# Altium PCB PCB1.PcbDoc (part 1 of 3)
Units mil, origin at the board's own origin, x right, y up, seen from the top; angles counter-clockwise.
Board outline 3937.79 x 3937.79 mil, 4 copper layers (L1, L2, L3, L4), stack 61.811 mil thick; 103 components, 203 nets, 917 pads, 494 vias.
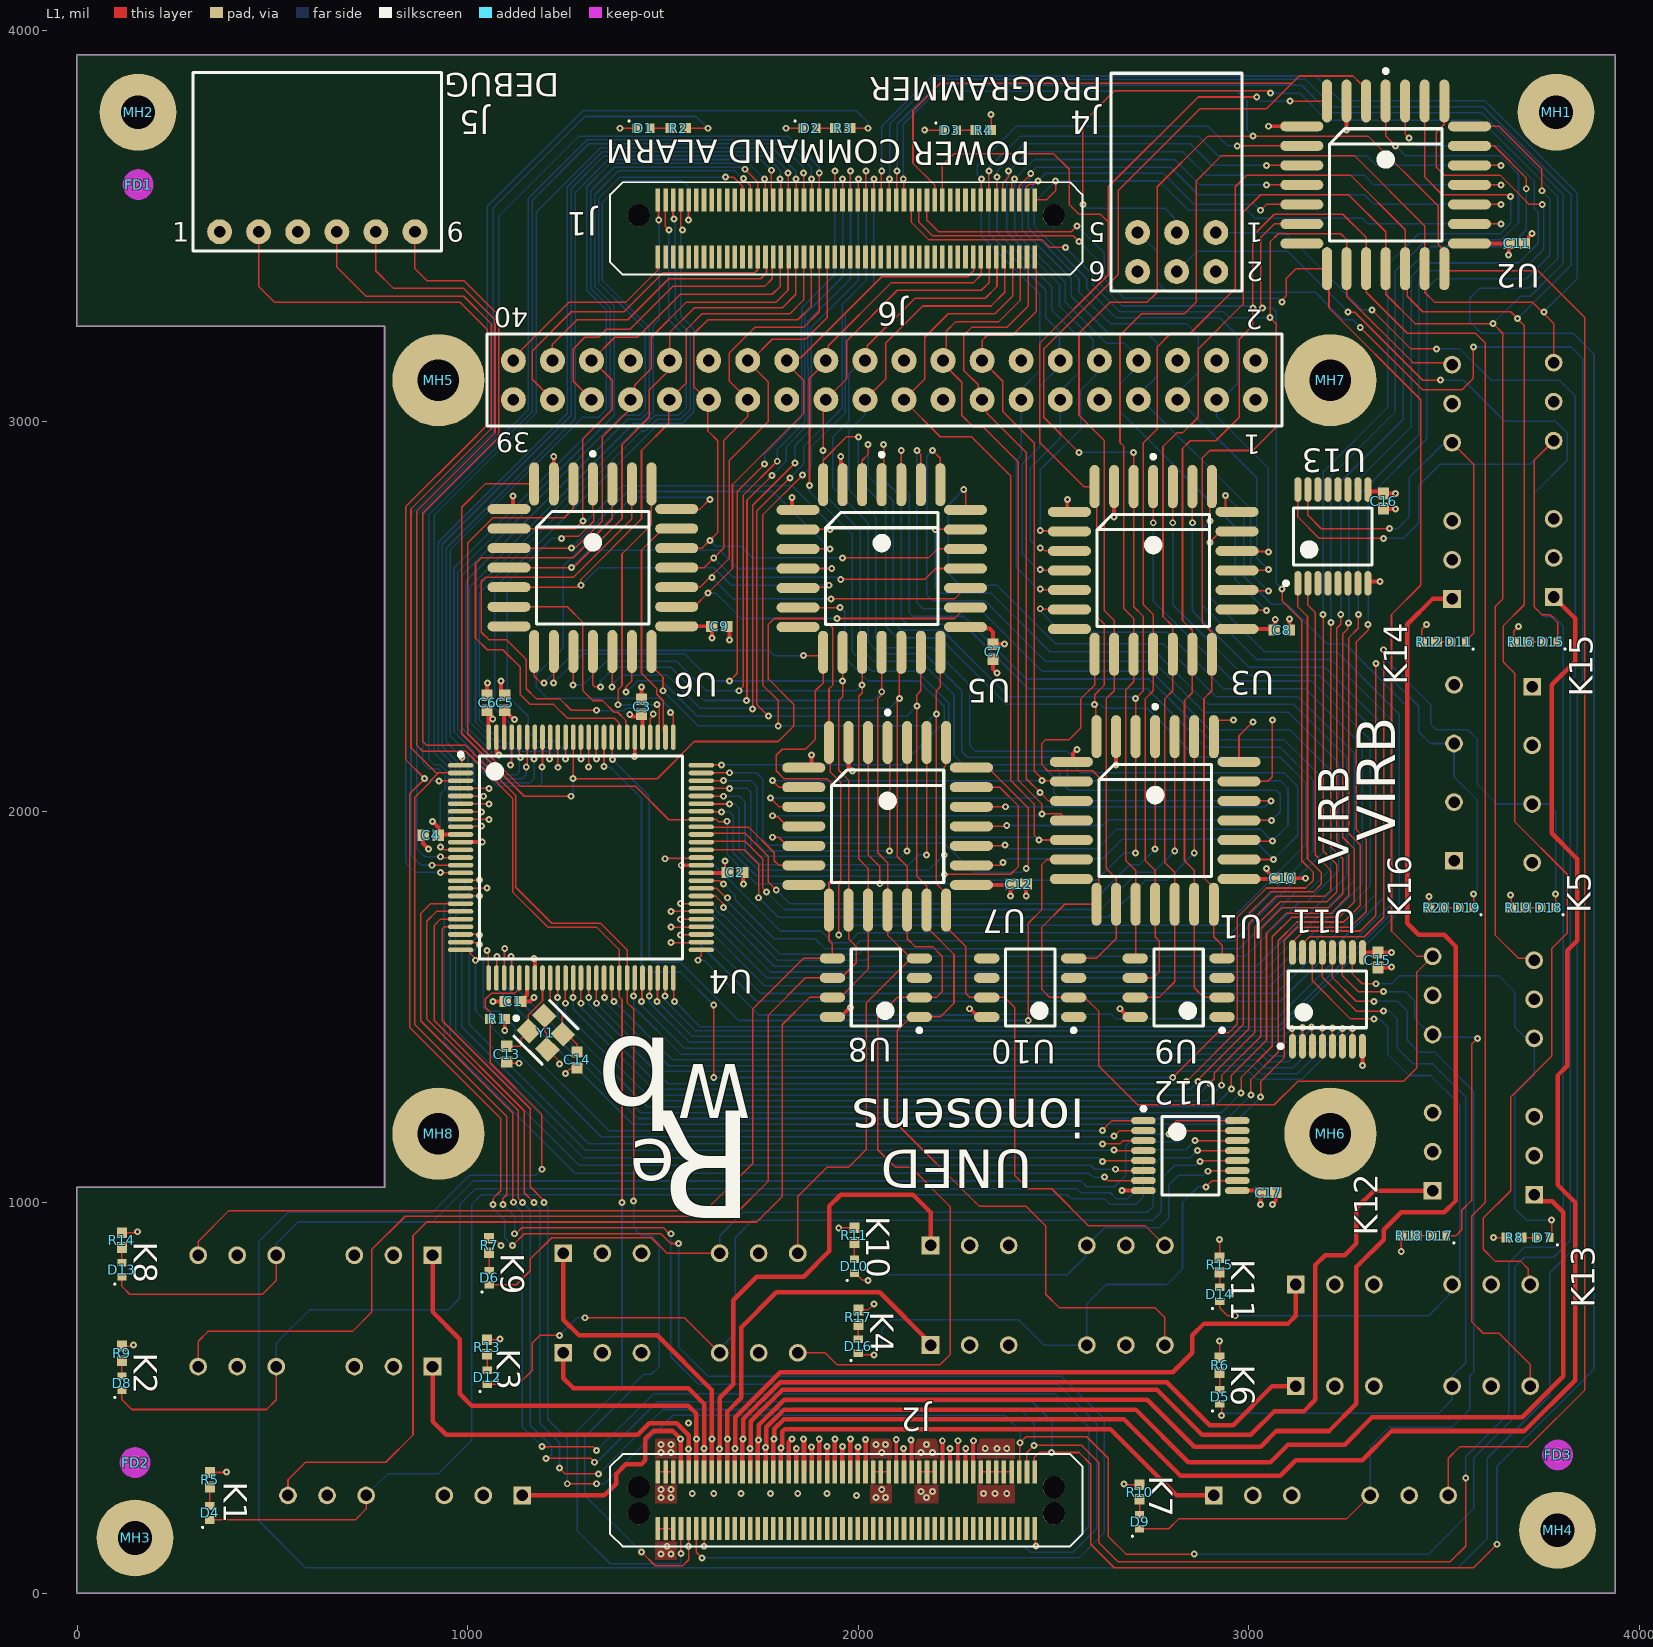
[diagram p0: L1 view]
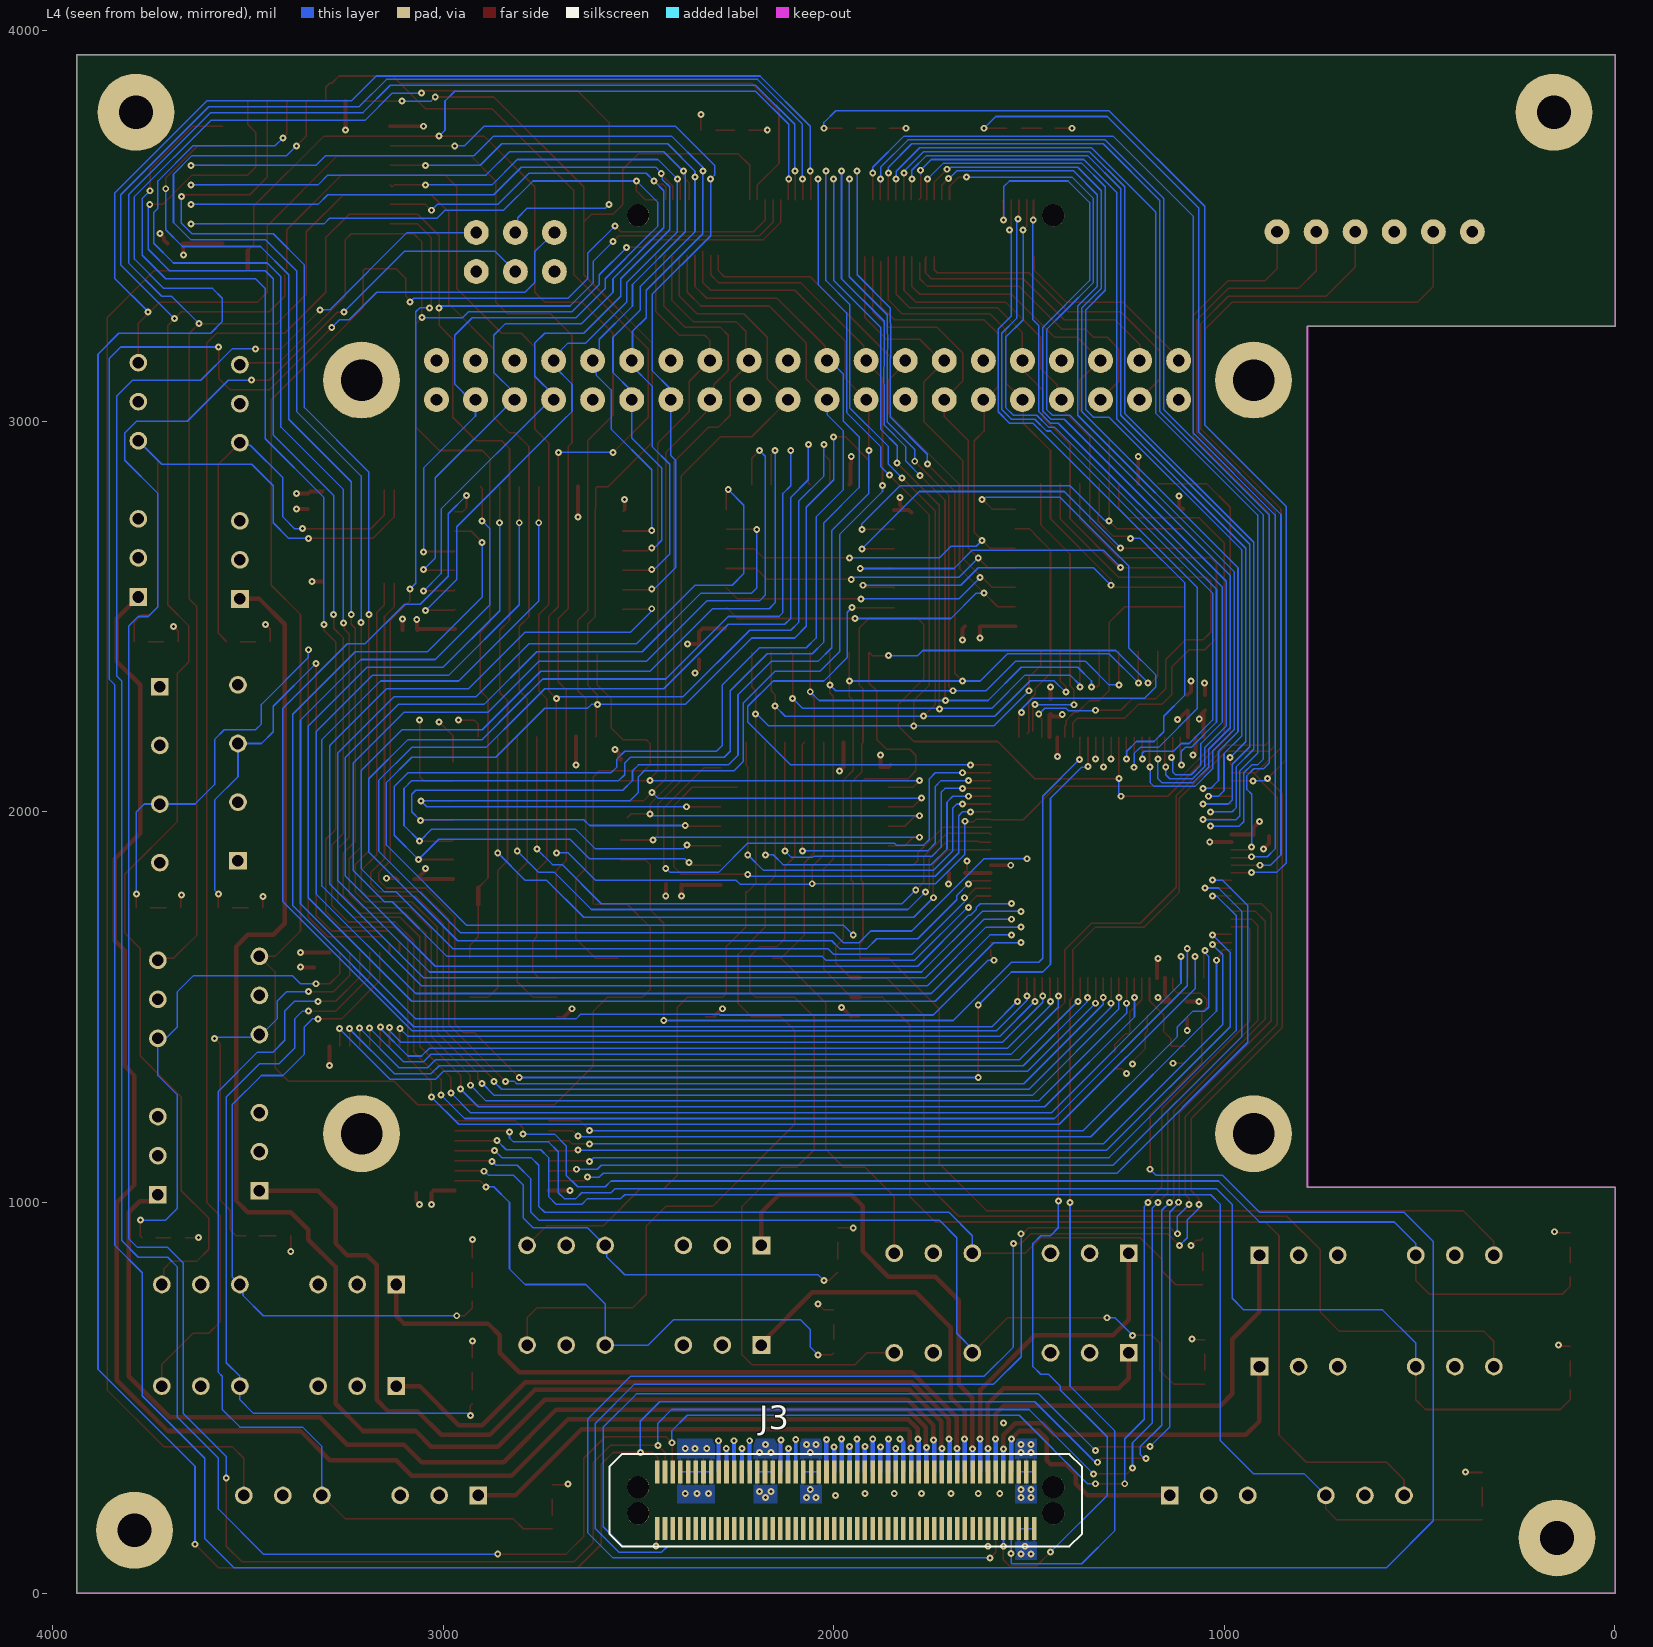
[diagram p1: L4 view, seen from below]
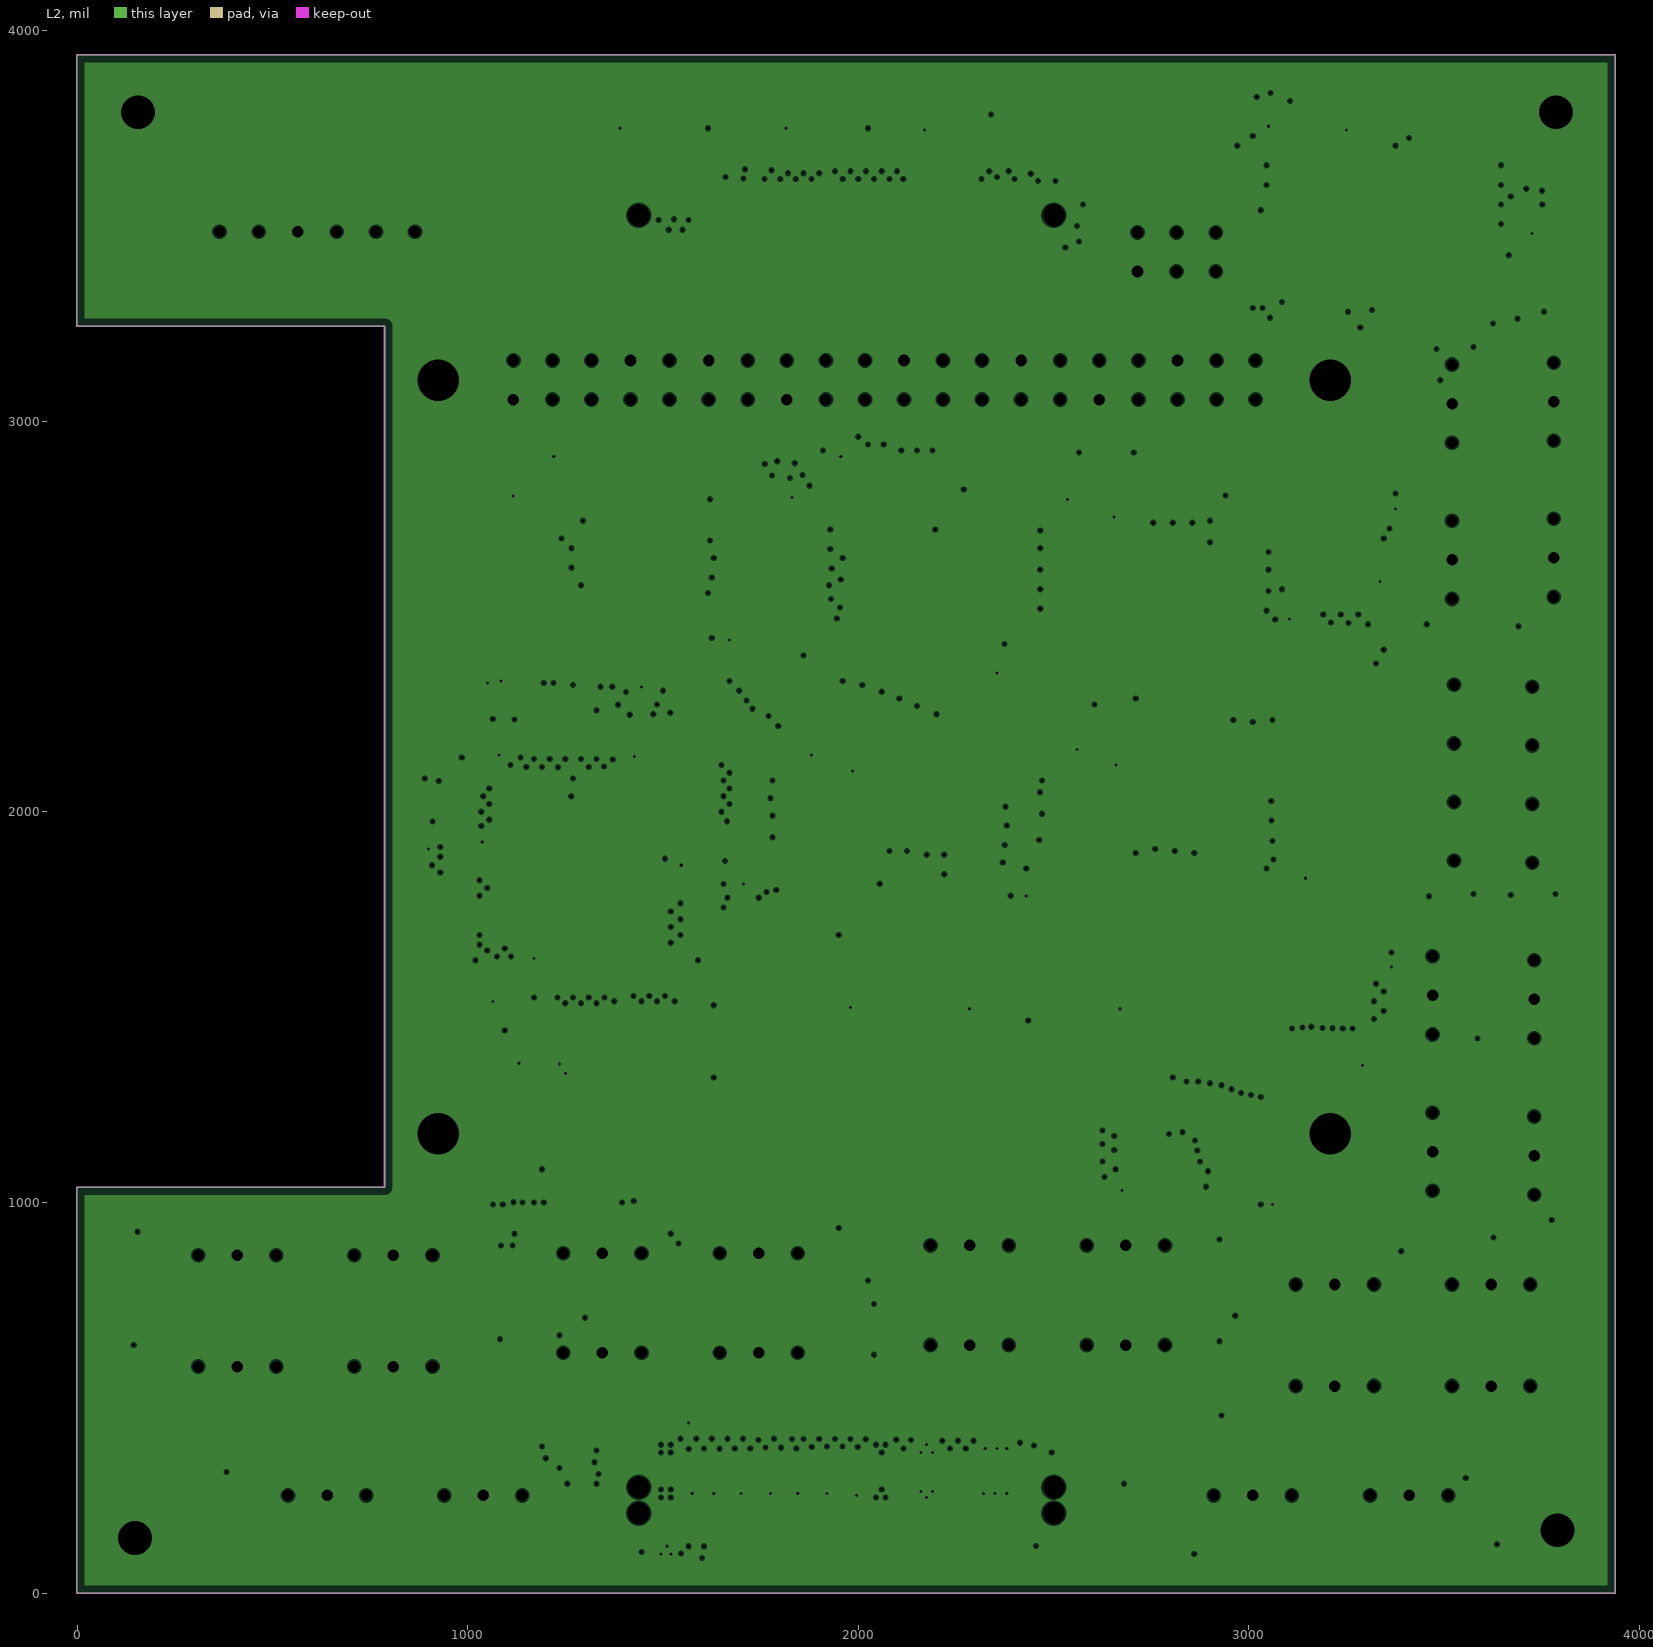
[diagram p2: L2, clearances drawn from the general rule]
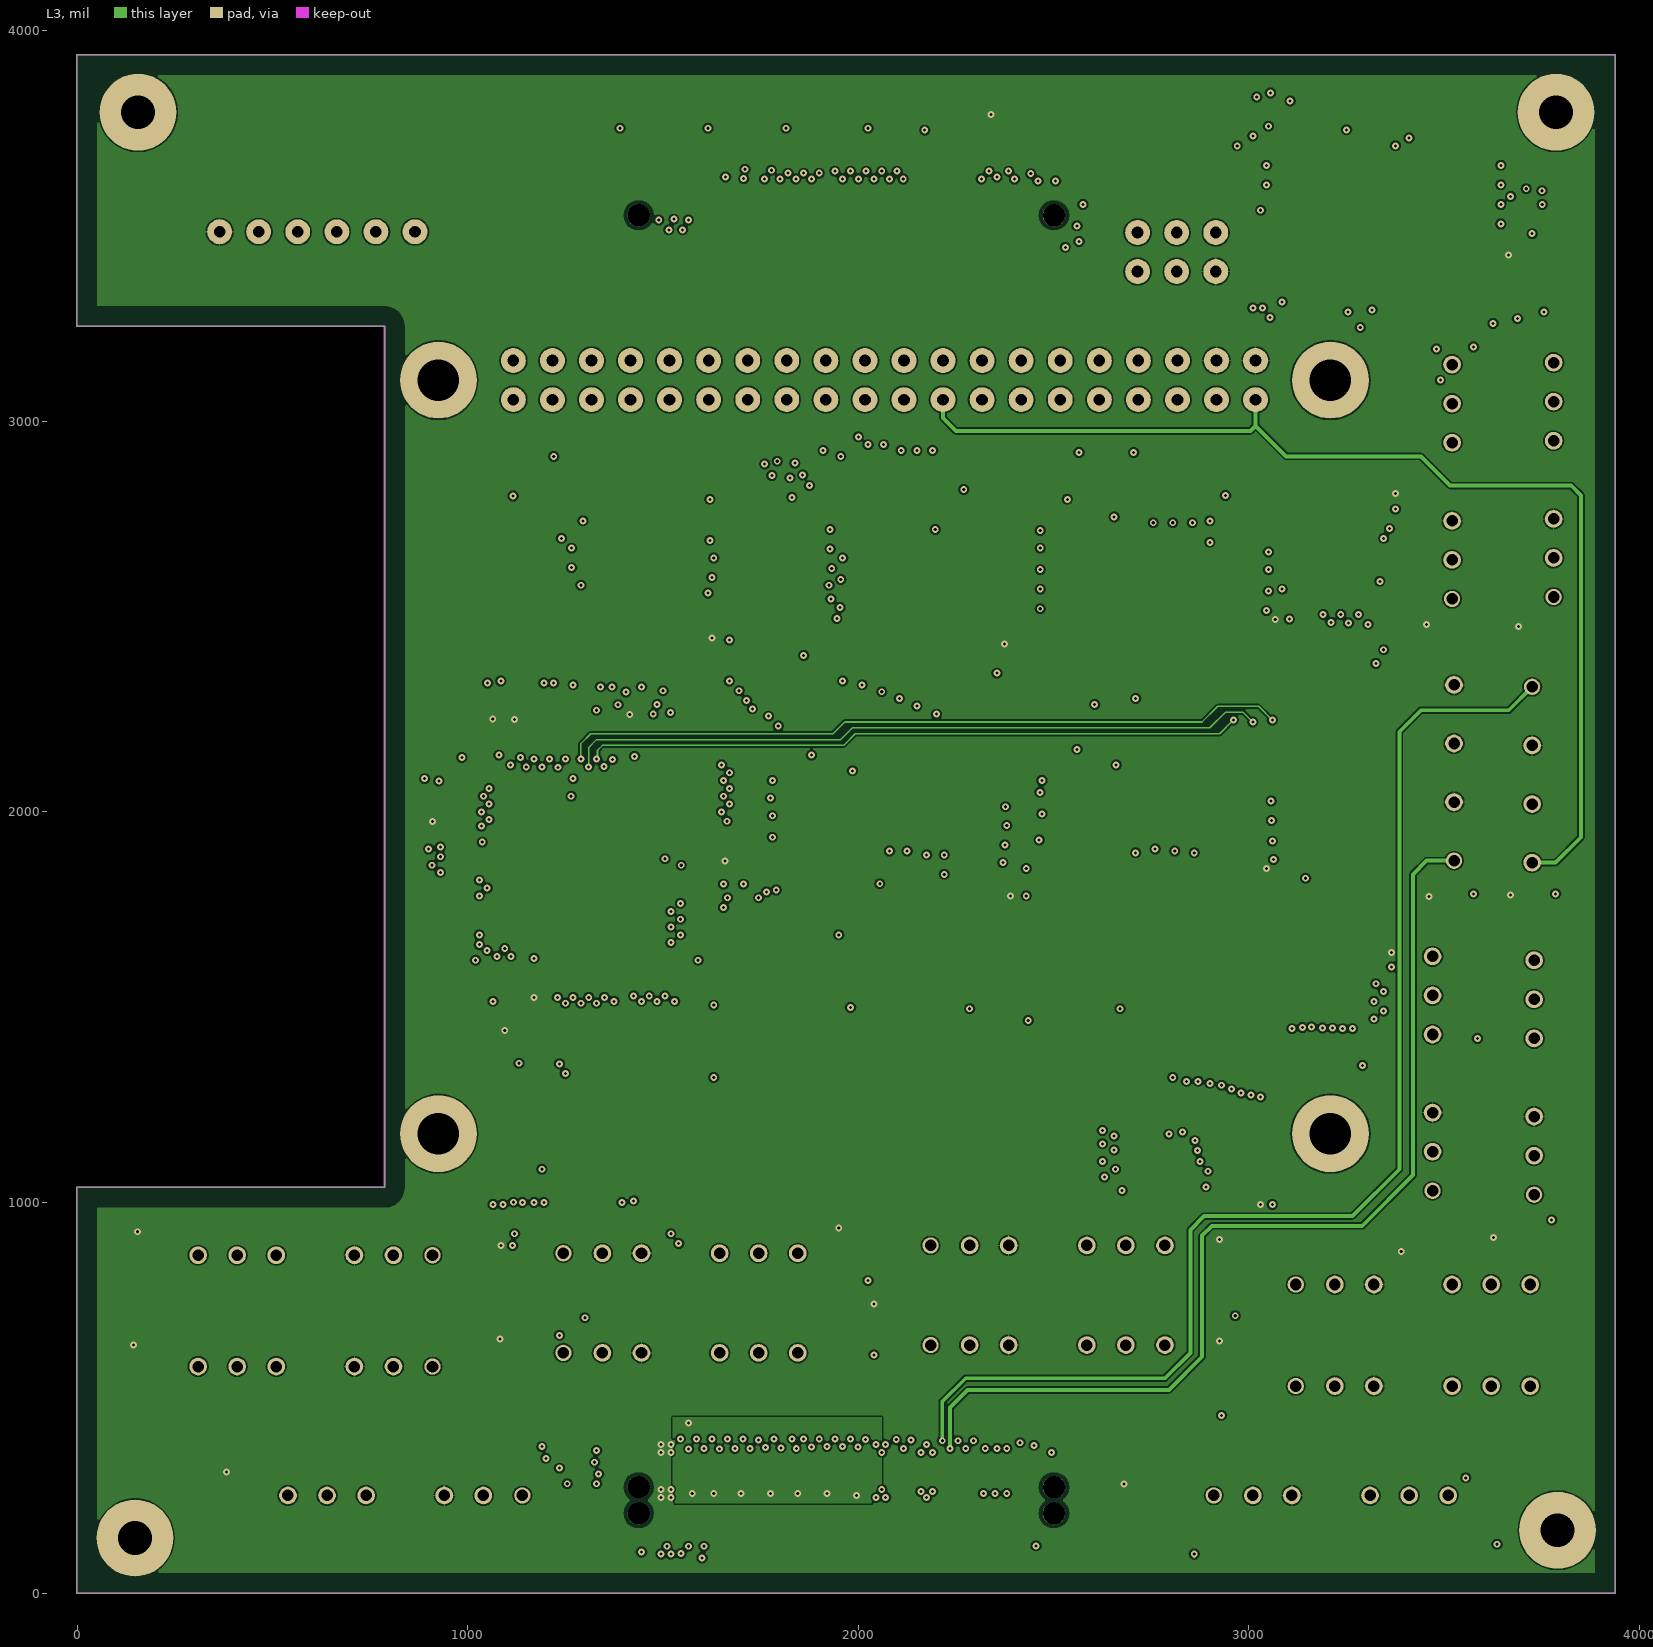
[diagram p3: L3]
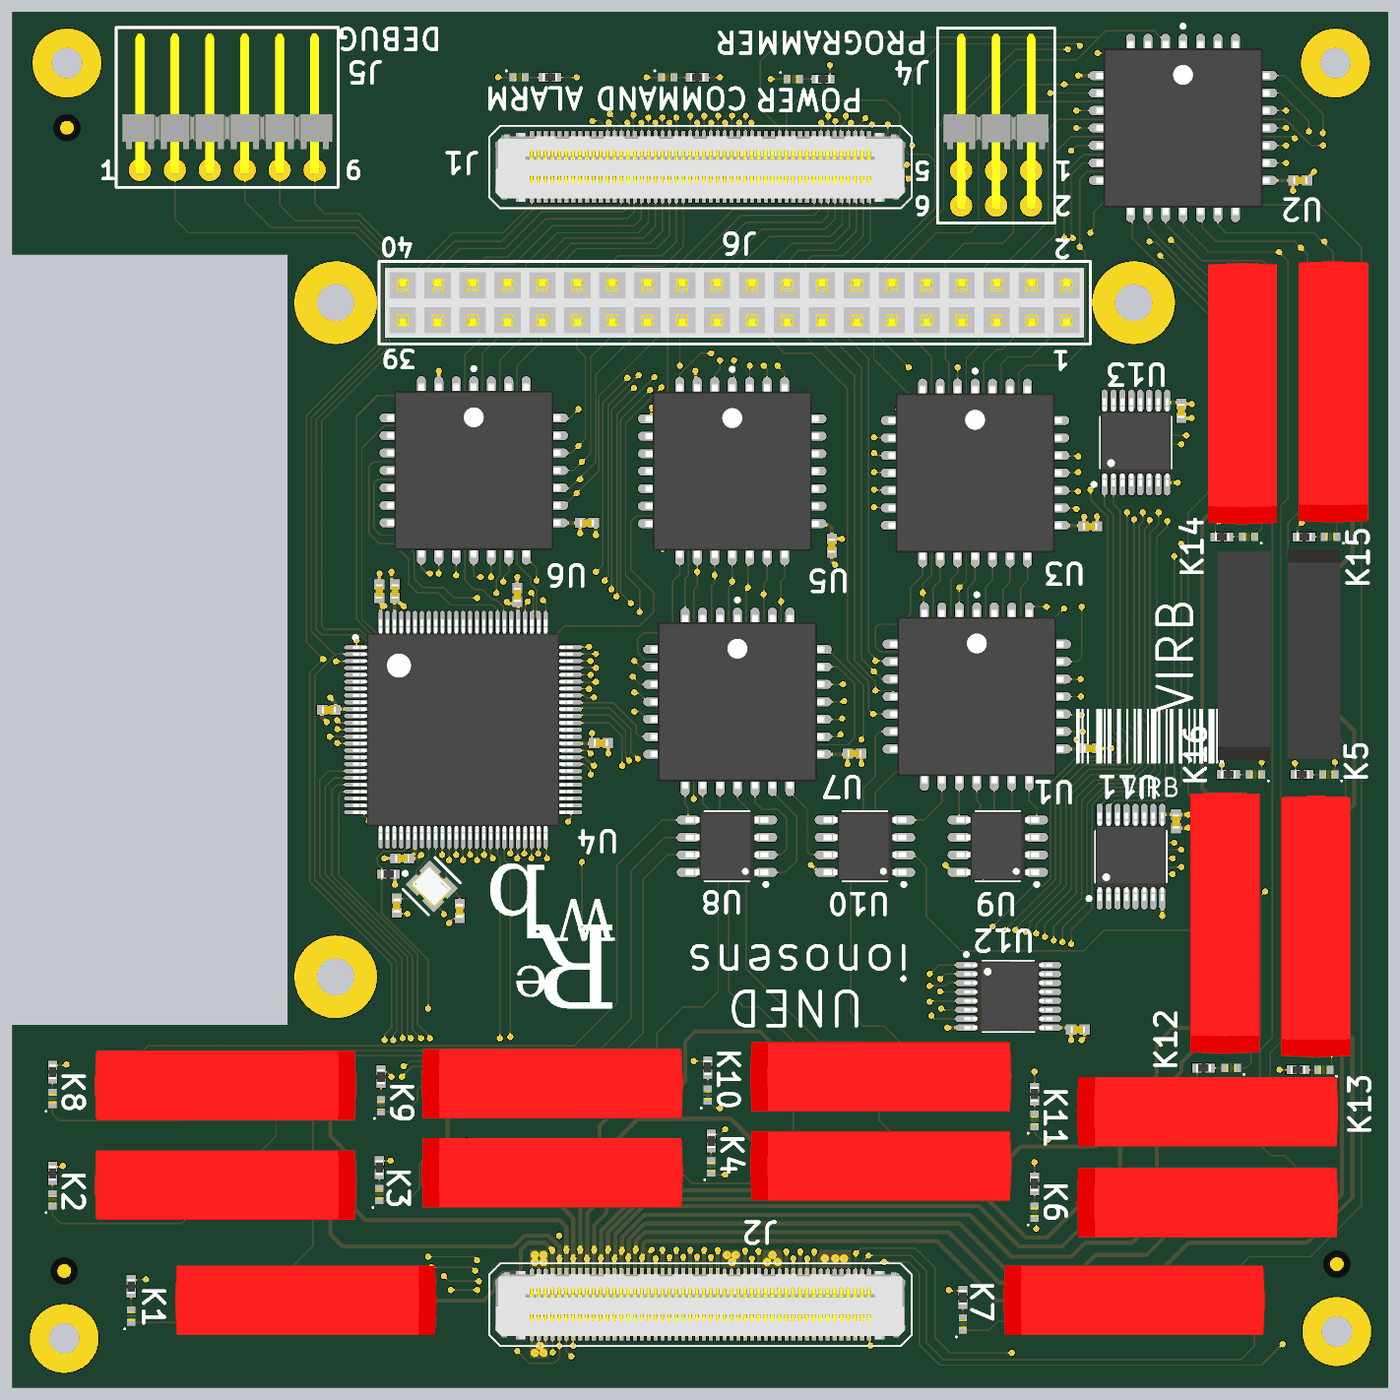
[diagram p6: 3D render of the assembled board from above, using the file's embedded part models]

## Layer stack, top to bottom
Top Mask: solder mask 0.5906, Solder Resist, Dk 3.8
L1: signal copper 1.378
Dielectric 1: prepreg 7.874, 7628, Dk 4.6
L2: plane copper 0.689, net GND
Core: core 41.9291, FR-4, Dk 4.5
L3: signal copper 0.689
Dielectric 2: prepreg 7.874, 7628, Dk 4.6
L4: signal copper 1.378
Bottom Mask: solder mask 0.5906, Solder Resist, Dk 3.8

## Board outline
-0.39,0.38 cw(c0,0.38) -0.27,0.66 -0.27,1038.27 cw(c0,1038.27) 0,1038.54 787.14,1038.54 787.14,3242.73 0,3242.73 cw(c0,3243) -0.27,3243 -0.27,3937.1 cw(c0,3937.38) -0.39,3937.38 cw(c0,3937.38) 0,3937.77 cw(c0,3937.38) 0.29,3937.65 3936.72,3937.65 cw(c3937.01,3937.38) 3937.01,3937.77 cw(c3937.01,3937.38) 3937.4,3937.38 cw(c3937.01,3937.38) 3937.27,3937.1 3937.27,0.66 cw(c3937.01,0.38) 3937.4,0.38 cw(c3937.01,0.38) 3937.01,-0.01 cw(c3937.01,0.38) 3936.72,0.11 0.29,0.11 cw(c0,0.38) 0,-0.01 cw(c0,0.38)

## Design rules (kind name [scope] priority, off if disabled: settings)
BoardOutlineClearance [All] p1: gap=7.87 ignorepadtopadclearanceinfootprint=FALSE
Clearance Clearance_keepoutlayer [All vs OnLayer('Keep-Out Layer')] p1: gap=50 ignorepadtopadclearanceinfootprint=FALSE except(4: Arc-THPad Track-THPad SMDPad-THPad THPad-THPad THPad-Via THPad-Fill THPad-Poly THPad-Region THPad-Text; 9.84: Arc-Hole Track-Hole SMDPad-Hole THPad-Hole Via-Hole Fill-Hole Poly-Hole Region-Hole Text-Hole)
Clearance [All] p2: gap=4 ignorepadtopadclearanceinfootprint=FALSE except(5: Arc-Via Track-Via SMDPad-Via THPad-Via Via-Via Via-Fill Via-Poly Via-Region Via-Text; 9.84: Arc-Hole Track-Hole SMDPad-Hole THPad-Hole Via-Hole Fill-Hole Poly-Hole Region-Hole Text-Hole)
ComponentClearance [All] p1: gap=4 collisioncheckmode=3 verticalgap=4 showdistances=TRUE
DiffPairsRouting [All] p1: maxlimit=4 minlimit=4 mostfreqgap=4 toplayer_minwidth=4 toplayer_maxwidth=71497.94 toplayer_prefwidth=4 midlayer14_minwidth=4 midlayer14_maxwidth=71497.94 midlayer14_prefwidth=4 bottomlayer_minwidth=4 bottomlayer_maxwidth=71497.94 bottomlayer_prefwidth=4 maxuncoupledlength=500
Height [All] p1: minheight=0 maxheight=71497.94 prefheight=500
HoleSize [All] p1: absolutevalues=TRUE maxlimit=248.03 minlimit=7.87 maxpercent=80.000 minpercent=20.000
HoleToHoleClearance [All] p1: gap=9.84 allowstackedmicrovias=FALSE
MinimumAnnularRing [All] p1: minimumring=3
MinimumSolderMaskSliver [All] p1: minsoldermaskwidth=0
PlaneClearance [All] p1: clearance=4
PlaneConnect PlaneConnectPowerPads [InPadClass('PowerPads')] p1: planeconnectstyle=Direct reliefexpansion=20 reliefentries=4 reliefconductorwidth=10 reliefairgap=10
PlaneConnect [All] p2: pad.planeconnectstyle=Relief pad.reliefexpansion=11.81 pad.reliefentries=4 pad.reliefconductorwidth=4 pad.reliefairgap=4 via.planeconnectstyle=Direct via.reliefexpansion=11.81 via.reliefentries=4 via.reliefconductorwidth=5 via.reliefairgap=5
PolygonConnect PolygonConnectPowerPads [All vs (InPadClass('PowerPads'))] p1: connectstyle=Direct reliefconductorwidth=10 reliefentries=4 polygonreliefangle="90 Angle" airgapwidth=10
PolygonConnect [All] p2: thpad.connectstyle=Relief thpad.reliefconductorwidth=4 thpad.reliefentries=4 thpad.polygonreliefangle="90 Angle" thpad.airgapwidth=4 smdpad.connectstyle=Relief smdpad.reliefconductorwidth=4 smdpad.reliefentries=4 smdpad.polygonreliefangle="90 Angle" smdpad.airgapwidth=4 via.connectstyle=Direct via.reliefconductorwidth=5 via.reliefentries=4 via.polygonreliefangle="90 Angle" via.airgapwidth=5
RoutingVias [All] p1: holewidth=7.87 width=17.72 viastyle="Through Hole" minholewidth=7.87 minwidth=17.72 maxholewidth=248.03 maxwidth=257.87
SilkToSilkClearance [All] p1: silktosilkclearance=0
SilkToSolderMaskClearance [IsPad] p1: minsilkscreentomaskgap=4 clearancetoexposedcopper=TRUE
SolderMaskExpansion [All] p1: expansion=2.95 istentingtop=FALSE
Width Width_50ohm [InNetClass('Nodes')] p1: maxlimit=11.55 minlimit=10 preferedwidth=11.55 toplayer_minwidth=11.55 bottomlayer_minwidth=11.55 impedanceprofiledriven=TRUE impedanceprofileid={71EFCF26-AA08-4542-81EE-32E5ED174DB4} impedanceprofilevalue=50.000000 minimp=50.000000 maximp=50.000000 favimp=50.000000
Width [All] p2: maxlimit=71497.94 minlimit=4 preferedwidth=4
20 further rules are at their usual default settings.

## Classes and differential pairs
net class Nodes: A B C D E F G H I J K L M N O P Q R S T U W X Y Z
component class Sheet3: FD1 FD2 FD3 J1 J2 J3 J4 J5 J6 MH1 MH2 MH3 MH4 MH5 MH6 MH7 MH8
component class Sheet2: D4 D5 D6 D7 D8 D9 D10 D11 D12 D13 D14 D15 D16 D17 D18 D19 K1 K2 K3 K4 K5 K6 K7 K8 K9 K10 K11 K12 K13 K14 K15 K16 R5 R6 R7 R8 R9 R10 R11 R12 R13 R14 R15 R16 R17 R18 R19 R20
component class Sheet1: C1 C2 C3 C4 C5 C6 C7 C8 C9 C10 C11 C12 C13 C14 C15 C16 C17 D1 D2 D3 R1 R2 R3 R4 U1 U2 U3 U4 U5 U6 U7 U8 U9 U10 U11 U12 U13 Y1

## Components (designator, comment, footprint, x,y, rotation, side; value= is the part's Value field where it differs from the comment)
C1 "CC0402JRX7R7BB104" CAPC1005X06M#1 1115.71,1515 r0 top value=100nF
C2 "CC0402JRX7R7BB104" CAPC1005X06M#1 1684.29,1845 r180 top value=100nF
C3 "CC0402JRX7R7BB104" CAPC1005X06M#1 1445,2269.29 r270 top value=100nF
C4 "CC0402JRX7R7BB104" CAPC1005X06M#1 905.71,1940 r0 top value=100nF
C5 "CC0402JRX7R7BB104" CAPC1005X06M#1 1095,2279.29 r270 top value=100nF
C6 "CC0402JRX7R7BB104" CAPC1005X06M#1 1050,2279.29 r270 top value=100nF
C7 "CC0402JRX7R7BB104" CAPC1005X06M#1 2345,2410 r90 top value=100nF
C8 "CC0402JRX7R7BB104" CAPC1005X06M#1 3084.29,2465 r180 top value=100nF
C9 "CC0402JRX7R7BB104" CAPC1005X06M#1 1644.29,2475 r180 top value=100nF
C10 "CC0402JRX7R7BB104" CAPC1005X06M#1 3085,1830 r180 top value=100nF
C11 "CC0402JRX7R7BB104" CAPC1005X06M#1 3685.71,3455 r180 top value=100nF
C12 "CC0402JRX7R7BB104" CAPC1005X06M#1 2410,1815 r180 top value=100nF
C13 "CC0402JRNPO9BN160" CAPC1005X06M#2 1100,1379.92 r90 top value=16pF
C14 "CC0402JRNPO9BN160" CAPC1005X06M#2 1280,1365 r90 top value=16pF
C15 "CC0402JRX7R7BB104" CAPC1005X06M#1 3330,1620.71 r90 top value=100nF
C16 "CC0402JRX7R7BB104" CAPC1005X06M#1 3345,2795.71 r90 top value=100nF
C17 "CC0402JRX7R7BB104" CAPC1005X06M#1 3049.29,1025 r180 top value=100nF
D1 "SML-P12UTT86R" DIOC1005X02R 1450,3750 r0 top
D2 "SML-P12UTT86R" DIOC1005X02R 1875,3750 r0 top
D3 "SML-P12UTT86R" DIOC1005X02R 2235,3745 r0 top
D4 "SML-P13PTT86R" DIOC1005X02R 340,205 r90 top
D5 "SML-P13PTT86R" DIOC1005X02R 2925,502.62 r90 top
D6 "SML-P13PTT86R" DIOC1005X02R 1055,807.18 r90 top
D7 "SML-P13PTT86R" DIOC1005X02R 3752.82,910 r180 top
D8 "SML-P13PTT86R" DIOC1005X02R 115,537.62 r90 top
D9 "SML-P13PTT86R" DIOC1005X02R 2720,182.18 r90 top
D10 "SML-P13PTT86R" DIOC1005X02R 1990,837.18 r90 top
D11 "SML-P13PTT86R" DIOC1005X02R 3537.38,2435 r180 top
D12 "SML-P13PTT86R" DIOC1005X02R 1050,552.62 r90 top
D13 "SML-P13PTT86R" DIOC1005X02R 115,827.62 r90 top
D14 "SML-P13PTT86R" DIOC1005X02R 2925,765 r90 top
D15 "SML-P13PTT86R" DIOC1005X02R 3772.38,2435 r180 top
D16 "SML-P13PTT86R" DIOC1005X02R 2000,632.18 r90 top
D17 "SML-P13PTT86R" DIOC1005X02R 3487.82,915 r180 top
D18 "SML-P13PTT86R" DIOC1005X02R 3767.38,1755 r180 top
D19 "SML-P13PTT86R" DIOC1005X02R 3557.38,1755 r180 top
FD1 "FID1X2R" FID1X2R 156.26,3605.79 r90 top
FD2 "FID1X2R" FID1X2R 148.39,334.13 r90 top
FD3 "FID1X2R" FID1X2R 3790.12,353.74 r90 top
J1 "LSHM-150-06.0-L-DV-A-N-K-TR" LSHM_150_06_0_L_DV_A_N_K_TR 1969.25,3493.58 r180 top
J2 "LSHM-150-06.0-L-DV-A-N-K-TR" LSHM_150_06_0_L_DV_A_N_K_TR 1969.25,237.68 r180 top
J3 "LSHM-150-06.0-L-DV-A-N-K-TR" LSHM_150_06_0_L_DV_A_N_K_TR 1969.25,237.68 r180 bottom
J4 "TSW-103-08-F-D-RA" TSW-103-08-F-D-RA 2815,3593 r180 top
J5 "HTSW-106-08-F-S-RA" TSW-106-08-F-S-RA 615,3595 r0 top
J6 "BCS-120-F-D-TE" BCS-120-F-D-TE 2066.93,3105.2 r180 top
K1 "9002-05-00" "SIP564W40P254L1980H810Q6 - Cloned" 840,250 r180 top
K2 "9002-05-00" "SIP564W40P254L1980H810Q6 - Cloned" 610,580 r180 top
K3 "9002-05-00" "SIP564W40P254L1980H810Q6 - Cloned" 1545,615 r0 top
K4 "9002-05-00" "SIP564W40P254L1980H810Q6 - Cloned" 2485,635 r0 top
K5 "3570.1419.051" 3570.1419 3725,2095 r270 top
K6 "9002-05-00" "SIP564W40P254L1980H810Q6 - Cloned" 3420,530 r0 top
K7 "9002-05-00" "SIP564W40P254L1980H810Q6 - Cloned" 3210,250 r0 top
K8 "9002-05-00" "SIP564W40P254L1980H810Q6 - Cloned" 610,865 r180 top
K9 "9002-05-00" "SIP564W40P254L1980H810Q6 - Cloned" 1545,870 r0 top
K10 "9002-05-00" "SIP564W40P254L1980H810Q6 - Cloned" 2485,890 r0 top
K11 "9002-05-00" "SIP564W40P254L1980H810Q6 - Cloned" 3420,790 r0 top
K12 "9002-05-00" "SIP564W40P254L1980H810Q6 - Cloned" 3470,1330 r90 top
K13 "9002-05-00" "SIP564W40P254L1980H810Q6 - Cloned" 3730,1320 r90 top
K14 "9002-05-00" "SIP564W40P254L1980H810Q6 - Cloned" 3520,2845 r90 top
K15 "9002-05-00" "SIP564W40P254L1980H810Q6 - Cloned" 3780,2850 r90 top
K16 "3570.1419.051" 3570.1419 3525,2100 r90 top
MH1 "C500h220" C500h220z368#1 3784.62,3755 r0 top
MH2 "C500h220" C500h220z368#2 149.62,3770 r0 top
MH3 "C500h220" C500h220z368#3 134.62,155 r0 top
MH4 "C500h220" C500h220z368#4 3759.62,155 r0 top
MH5 "C600h270" C600h270z368#1 600,3013 r0 top
MH6 "C600h270" C600h270z368#2 5390,723 r0 top
MH7 "C600h270" C600h270z368#3 3225,3108 r0 top
MH8 "C600h270" C600h270z368#4 940,1203 r0 top
R1 "AC0402FR-0710KL" RESC1005X04M 1076.3,1470 r0 top value=10k
R2 "AC0402FR-07240RL" RESC1005X04M 1538.7,3750 r180 top value=240
R3 "AC0402FR-07240RL" RESC1005X04M 1960,3750 r180 top value=240
R4 "AC0402FR-07240RL" RESC1005X04M 2320,3745 r180 top value=240
R5 "AC0402FR-07240RL" RESC1005X04M 340,290 r270 top value=240
R6 "AC0402FR-07240RL" RESC1005X04M 2925,583.7 r270 top value=240
R7 "AC0402FR-07240RL" RESC1005X04M 1055,890 r270 top value=240
R8 "AC0402FR-07240RL" RESC1005X04M 3678.7,910 r0 top value=240
R9 "AC0402FR-07240RL" RESC1005X04M 115,613.7 r270 top value=240
R10 "AC0402FR-07240RL" RESC1005X04M 2720,258.7 r270 top value=240
R11 "AC0402FR-07240RL" RESC1005X04M 1990,916.3 r270 top value=240
R12 "AC0402FR-07240RL" RESC1005X04M 3461.3,2435 r0 top value=240
R13 "AC0402FR-07240RL" RESC1005X04M 1050,630 r270 top value=240
R14 "AC0402FR-07240RL" RESC1005X04M 115,903.7 r270 top value=240
R15 "AC0402FR-07240RL" RESC1005X04M 2925,840 r270 top value=240
R16 "AC0402FR-07240RL" RESC1005X04M 3696.3,2435 r0 top value=240
R17 "AC0402FR-07240RL" RESC1005X04M 2000,706.3 r270 top value=240
R18 "AC0402FR-07240RL" RESC1005X04M 3408.7,915 r0 top value=240
R19 "AC0402FR-07240RL" RESC1005X04M 3690,1755 r0 top value=240
R20 "AC0402FR-07240RL" RESC1005X04M 3480,1755 r0 top value=240
U1 "MT8808AP1" PLCC127P1244X1244X457-28M 2760,1978 r0 top
U2 "MT8808AP1" PLCC127P1244X1244X457-28M 3350,3605 r0 top
U3 "MT8808AP1" PLCC127P1244X1244X457-28M 2755,2618 r0 top
U4 "ATMEGA2560-16AU" ATML-100A_M 1290,1883 r0 top
U5 "MT8808AP1" PLCC127P1244X1244X457-28M 2060,2623 r0 top
U6 "MT8808AP1" PLCC127P1244X1244X457-28M 1320.43,2625 r0 top
U7 "MT8808AP1" PLCC127P1244X1244X457-28M 2075,1963 r0 top
U8 "SRDA3.3-6.TBT" SOIC127P600X175-8M 2045,1550 r180 top
U9 "SRDA3.3-6.TBT" SOIC127P600X175-8M 2820,1550 r180 top
U10 "SRDA3.3-6.TBT" SOIC127P600X175-8M 2440,1550 r180 top
U11 "ULN2003AIPWR" TSOP65P640X120-16M 3201.02,1520.08 r90 top
U12 "ULN2003AIPWR" TSOP65P640X120-16M 2850,1120 r0 top
U13 "ULN2003AIPWR" TSOP65P640X120-16M 3215,2705 r90 top
Y1 "Q24FA20H0024700" FA-20H 1200,1435 r315 top

## Footprints (in the part's own frame and the unit in brackets; to place one, negate y for a bottom-side part, rotate by r counter-clockwise, add the part's x,y. Pads: shape width x height; smd on the part's side, far side on the other; paste and mask are expansions set on the pad)
3570.1419 [mil] "Grade Mini SIP - 1 Form A"
  rect 45.28x45.28 / inner round 41.83 / far side rect 45.28x45.28 hole 29.53: 1(-225,0)
  round 45.28 hole 29.53: 2(-75,0) 3(75,0) 4(225,0)
  body extent -305,-75 295,75, height 255
ATML-100A_M [mm] "TQFP, 100-Leads, Body 14x14mm, Pitch 0.5mm, IPC Low Density"
  oval 1.65x0.3 smd: 1(-7.825,6) 2(-7.825,5.5) 3(-7.825,5) 4(-7.825,4.5) 5(-7.825,4) 6(-7.825,3.5) 7(-7.825,3) 8(-7.825,2.5) 9(-7.825,2) 10(-7.825,1.5) 11(-7.825,1) 12(-7.825,0.5) 13(-7.825,0) 14(-7.825,-0.5) 15(-7.825,-1) 16(-7.825,-1.5) 17(-7.825,-2) 18(-7.825,-2.5) 19(-7.825,-3) 20(-7.825,-3.5) 21(-7.825,-4) 22(-7.825,-4.5) 23(-7.825,-5) 24(-7.825,-5.5) 25(-7.825,-6) 51(7.825,-6) 52(7.825,-5.5) 53(7.825,-5) 54(7.825,-4.5) 55(7.825,-4) 56(7.825,-3.5) 57(7.825,-3) 58(7.825,-2.5) 59(7.825,-2) 60(7.825,-1.5) 61(7.825,-1) 62(7.825,-0.5) 63(7.825,0) 64(7.825,0.5) 65(7.825,1) 66(7.825,1.5) 67(7.825,2) 68(7.825,2.5) 69(7.825,3) 70(7.825,3.5) 71(7.825,4) 72(7.825,4.5) 73(7.825,5) 74(7.825,5.5) 75(7.825,6)
  oval 0.3x1.65 smd: 26(-6,-7.825) 27(-5.5,-7.825) 28(-5,-7.825) 29(-4.5,-7.825) 30(-4,-7.825) 31(-3.5,-7.825) 32(-3,-7.825) 33(-2.5,-7.825) 34(-2,-7.825) 35(-1.5,-7.825) 36(-1,-7.825) 37(-0.5,-7.825) 38(0,-7.825) 39(0.5,-7.825) 40(1,-7.825) 41(1.5,-7.825) 42(2,-7.825) 43(2.5,-7.825) 44(3,-7.825) 45(3.5,-7.825) 46(4,-7.825) 47(4.5,-7.825) 48(5,-7.825) 49(5.5,-7.825) 50(6,-7.825) 76(6,7.825) 77(5.5,7.825) 78(5,7.825) 79(4.5,7.825) 80(4,7.825) 81(3.5,7.825) 82(3,7.825) 83(2.5,7.825) 84(2,7.825) 85(1.5,7.825) 86(1,7.825) 87(0.5,7.825) 88(0,7.825) 89(-0.5,7.825) 90(-1,7.825) 91(-1.5,7.825) 92(-2,7.825) 93(-2.5,7.825) 94(-3,7.825) 95(-3.5,7.825) 96(-4,7.825) 97(-4.5,7.825) 98(-5,7.825) 99(-5.5,7.825) 100(-6,7.825)
  silkscreen extent -7.95,-6.6 6.6,6.82, body extent -8,-8 8,8, height 1.2
BCS-120-F-D-TE [mm] "coonector samtec"
  round 1.62 hole 0.762: 1(-24.13,1.27) 2(-24.13,-1.27) 3(-21.59,1.27) 4(-21.59,-1.27) 5(-19.05,1.27) 6(-19.05,-1.27) 7(-16.51,1.27) 8(-16.51,-1.27) 9(-13.97,1.27) 10(-13.97,-1.27) 11(-11.43,1.27) 12(-11.43,-1.27) 13(-8.89,1.27) 14(-8.89,-1.27) 15(-6.35,1.27) 16(-6.35,-1.27) 17(-3.81,1.27) 18(-3.81,-1.27) 19(-1.27,1.27) 20(-1.27,-1.27) 21(1.27,1.27) 22(1.27,-1.27) 23(3.81,1.27) 24(3.81,-1.27) 25(6.35,1.27) 26(6.35,-1.27) 27(8.89,1.27) 28(8.89,-1.27) 29(11.43,1.27) 30(11.43,-1.27) 31(13.97,1.27) 32(13.97,-1.27) 33(16.51,1.27) 34(16.51,-1.27) 35(19.05,1.27) 36(19.05,-1.27) 37(21.59,1.27) 38(21.59,-1.27) 39(24.13,1.27) 40(24.13,-1.27)
  silkscreen extent -25.85,-2.99 25.85,2.99, body extent -25.4,-2.54 25.4,2.54, height 7.37
C500h220z368#1 [mm] "C500h220z368 hole"
  round 5 hole 2.2: 1(0.04,0.91)
C500h220z368#2 [mm] "C500h220z368 hole"
  round 5 hole 2.2: 1(0.169,0.529)
C500h220z368#3 [mm] "C500h220z368 hole"
  round 5 hole 2.2: 1(0.35,-0.35)
C500h220z368#4 [mm] "C500h220z368 hole"
  round 5 hole 2.2: 1(0.775,0.15)
C600h270z368#1 [mm] "C600h270z368 hole"
  round 6 / inner round 5 / far side round 5 hole 2.7: 1(8.26,2.342)
C600h270z368#2 [mm] "C600h270z368 hole"
  round 6 / inner round 5 / far side round 5 hole 2.7: 1(-55.406,11.508)
C600h270z368#3 [mm] "C600h270z368 hole"
  round 6 / inner round 5 / far side round 5 hole 2.7: 1(-0.415,-0.071)
C600h270z368#4 [mm] "C600h270z368 hole"
  round 6 / inner round 5 / far side round 5 hole 2.7: 1(-0.376,-0.684)
CAPC1005X06M#1 [mm] "Chip Capacitor, 2-Leads, Body 1,00x0,50mm, IPC Low Density"
  rect 0.76x0.72 smd: 1(-0.49,0) 2(0.49,0)
  body extent -0.53,-0.28 0.53,0.28, height 0.55
CAPC1005X06M#2 [mm] "Chip Capacitor, 2-Leads, Body 1,00x0,50mm, IPC Low Density"
  rect 0.72x0.72 smd: 1(-0.51,0) 2(0.51,0)
  body extent -0.53,-0.28 0.53,0.28, height 0.55
DIOC1005X02R [mm] "Chip Diode, 2-Leads, Body 1,00x0,50mm, Manufacturer Recommended"
  rect 0.5x0.6 smd paste+0 mask+0: 1(-0.447,0) 2(0.453,0)
  silkscreen extent -0.98,0.42 -0.88,0.52, body extent -0.8,-0.43 0.8,0.43, height 0.25
FA-20H [mm] "SEIKO EPSON CRYSTAL"
  rect 1.2x1.1 smd paste+0 mask+0: 1(-0.85,-0.7) 2(0.85,-0.7) 3(0.85,0.7) 4(-0.85,0.7)
  silkscreen extent -2.15,-1.63 1.3,1.65, body extent -1.55,-1.35 1.55,1.35, height 0.25
FID1X2R [mm] "Fiducial - Round 1x2mm"
  round 1 smd paste-0.5 mask+0.5: 0(0,0)
  L1 keep-out circle w1: c0,0 r0.5
  L1 keep-out region: 0,0
LSHM_150_06_0_L_DV_A_N_K_TR [mm] "LSHM_150_06_0_L_DV_A_N_K_TR Without Shield"
  rect 0.3x1.5 smd: 1(12.25,-1.85) 2(12.25,1.85) 3(11.75,-1.85) 4(11.75,1.85) 5(11.25,-1.85) 6(11.25,1.85) 7(10.75,-1.85) 8(10.75,1.85) 9(10.25,-1.85) 10(10.25,1.85) 11(9.75,-1.85) 12(9.75,1.85) 13(9.25,-1.85) 14(9.25,1.85) 15(8.75,-1.85) 16(8.75,1.85) 17(8.25,-1.85) 18(8.25,1.85) 19(7.75,-1.85) 20(7.75,1.85) 21(7.25,-1.85) 22(7.25,1.85) 23(6.75,-1.85) 24(6.75,1.85) 25(6.25,-1.85) 26(6.25,1.85) 27(5.75,-1.85) 28(5.75,1.85) 29(5.25,-1.85) 30(5.25,1.85) 31(4.75,-1.85) 32(4.75,1.85) 33(4.25,-1.85) 34(4.25,1.85) 35(3.75,-1.85) 36(3.75,1.85) 37(3.25,-1.85) 38(3.25,1.85) 39(2.75,-1.85) 40(2.75,1.85) 41(2.25,-1.85) 42(2.25,1.85) 43(1.75,-1.85) 44(1.75,1.85) 45(1.25,-1.85) 46(1.25,1.85) 47(0.75,-1.85) 48(0.75,1.85) 49(0.25,-1.85) 50(0.25,1.85) 51(-0.25,-1.85) 52(-0.25,1.85) 53(-0.75,-1.85) 54(-0.75,1.85) 55(-1.25,-1.85) 56(-1.25,1.85) 57(-1.75,-1.85) 58(-1.75,1.85) 59(-2.25,-1.85) 60(-2.25,1.85) 61(-2.75,-1.85) 62(-2.75,1.85) 63(-3.25,-1.85) 64(-3.25,1.85) 65(-3.75,-1.85) 66(-3.75,1.85) 67(-4.25,-1.85) 68(-4.25,1.85) 69(-4.75,-1.85) 70(-4.75,1.85) 71(-5.25,-1.85) 72(-5.25,1.85) 73(-5.75,-1.85) 74(-5.75,1.85) 75(-6.25,-1.85) 76(-6.25,1.85) 77(-6.75,-1.85) 78(-6.75,1.85) 79(-7.25,-1.85) 80(-7.25,1.85) 81(-7.75,-1.85) 82(-7.75,1.85) 83(-8.25,-1.85) 84(-8.25,1.85) 85(-8.75,-1.85) 86(-8.75,1.85) 87(-9.25,-1.85) 88(-9.25,1.85) 89(-9.75,-1.85) 90(-9.75,1.85) 91(-10.25,-1.85) 92(-10.25,1.85) 93(-10.75,-1.85) 94(-10.75,1.85) 95(-11.25,-1.85) 96(-11.25,1.85) 97(-11.75,-1.85) 98(-11.75,1.85) 99(-12.25,-1.85) 100(-12.25,1.85)
  round 1.45 hole 1.45 unplated: ""(-13.5,-0.85) ""(13.5,-0.85)
  silkscreen extent -15.35,-3 15.35,3, body extent -14.88,-2.46 14.92,2.52, height 7.3
PLCC127P1244X1244X457-28M [mm] "Leaded Chip Carrier, 28-Leads, Body 12,45x12,45mm, Pitch 1,270mm, IPC Low Density"
  oval 0.65x2.8 smd: 1(0,5.45) 2(-1.27,5.45) 3(-2.54,5.45) 4(-3.81,5.45) 12(-3.81,-5.45) 13(-2.54,-5.45) 14(-1.27,-5.45) 15(0,-5.45) 16(1.27,-5.45) 17(2.54,-5.45) 18(3.81,-5.45) 26(3.81,5.45) 27(2.54,5.45) 28(1.27,5.45)
  oval 2.8x0.65 smd: 5(-5.45,3.81) 6(-5.45,2.54) 7(-5.45,1.27) 8(-5.45,0) 9(-5.45,-1.27) 10(-5.45,-2.54) 11(-5.45,-3.81) 19(5.45,-3.81) 20(5.45,-2.54) 21(5.45,-1.27) 22(5.45,0) 23(5.45,1.27) 24(5.45,2.54) 25(5.45,3.81)
  silkscreen extent -3.65,-3.65 3.65,7.52, body extent -6.42,-6.42 6.42,6.42, height 4.57
RESC1005X04M [mm] "Chip Resistor, 2-Leads, Body 1,00x0,50mm, IPC Low Density"
  rect 0.7x0.65 smd: 1(-0.475,0) 2(0.475,0)
  body extent -0.53,-0.28 0.53,0.28, height 0.37
"SIP564W40P254L1980H810Q6 - Cloned" [mil] "SIP, 2.54 mm pitch; 7 pin, 19.80 mm L X 5.64 mm W X 8.10 mm H body"
  rect 45.28x45.28 / inner round 41.83 / far side rect 45.28x45.28 hole 29.53: 1(-300,0)
  round 45.28 hole 29.53: 2(-100,0) 3(100,0) 4(300,0) 5(-200,0) 6(200,0)
  body extent -374,-99 374,99, height 300
SOIC127P600X175-8M [mm] "SOIC, 8-Leads, Body 4,90x3,90mm, Pitch 1,27mm, IPC Low Density"
  oval 1.65x0.65 smd: 1(-2.825,1.905) 2(-2.825,0.635) 3(-2.825,-0.635) 4(-2.825,-1.905) 5(2.825,-1.905) 6(2.825,-0.635) 7(2.825,0.635) 8(2.825,1.905)
  silkscreen extent -2.95,-2.5 1.6,2.9, body extent -3,-2.5 3,2.5, height 1.75
TSOP65P640X120-16M [mm] "TSOP, 16-Leads, Body 5,00x4,40mm, Pitch 0,65mm, IPC Low Density"
  oval 1.6x0.45 smd: 1(-3.05,2.275) 2(-3.05,1.625) 3(-3.05,0.975) 4(-3.05,0.325) 5(-3.05,-0.325) 6(-3.05,-0.975) 7(-3.05,-1.625) 8(-3.05,-2.275) 9(3.05,-2.275) 10(3.05,-1.625) 11(3.05,-0.975) 12(3.05,-0.325) 13(3.05,0.325) 14(3.05,0.975) 15(3.05,1.625) 16(3.05,2.275)
  silkscreen extent -3.17,-2.55 1.85,3.17, body extent -3.2,-2.55 3.2,2.55, height 1.2
TSW-103-08-F-D-RA [mil] "6 Pin Header Vertical, right-angle"
  round 63.78 hole 30: 1(-100,110) 2(-100,210) 3(0,110) 4(0,210) 5(100,110) 6(100,210)
  silkscreen extent -168,-298 168,260, body extent -150,-281 150,221, height 218
TSW-106-08-F-S-RA [mil] "6 Pin Header, right-angle, 1 row"
  round 63.78 hole 30: 1(-250,-110) 2(-150,-110) 3(-50,-110) 4(50,-110) 5(150,-110) 6(250,-110)
  silkscreen extent -318,-160 318,298, body extent -300,-122 300,280, height 121

## Part data
C1 C2 C3 C4 C5 C6 C7 C8 C9 C10 C11 C12 C15 C16 C17: library part C01-0402-01-00001-1, "Cap Ceramic 100nF 50V X7R 5% SMD 0402 125°C", Capacitor Type=Ceramic, Case/Package=0402, Dielectric=X7R, Manufacturer=YAGEO, Max Operating Temperature=125°C, Min Operating Temperature=-55°C, Tolerance=5%, Voltage Rating=16V, Composition=Ceramic, Depth=500µm, Length=1mm, Manufacturer P/N=CC0402JRX7R7BB104, Mount="Surface Mount", Mounting Technology="Surface Mount", Pins=2, RoHS Compliant=Yes, Termination=SMD/SMT, Thickness=558.8µm, Voltage Rating (DC)=16V, Width=508µm
C13 C14: library part C01-0402-01-00000-2, "Cap Ceramic 16pF 50V C0G 5% SMD 0402 125°C", Capacitor Type=Ceramic, Case/Package=0402, Dielectric=COG, Manufacturer=YAGEO, Max Operating Temperature=125°C, Min Operating Temperature=-55°C, Tolerance=5%, Voltage Rating=50V, Composition=Ceramic, Depth=500µm, Length=990.6µm, Manufacturer P/N=CC0402JRNPO9BN160, Mount="Surface Mount", Mounting Technology="Surface Mount", Pins=2, RoHS Compliant=Yes, Termination=SMD/SMT, Thickness=558.8µm, Voltage Rating (DC)=50V, Width=508µm
D1 D2 D3: library part D01-0402-01-00001-1, "Led red 0402", Case/Package=0402, Colour=red, Forward Current="20 mA", Forward Voltage=2V, Manufacturer=ROHM, Max Operating Temperature=85°C, Max Power Dissipation=52mW, Min Operating Temperature=-40°C, Dominant Wavelength="620 nm", Lens Style="Rectangular, Square", Luminous Intensity="85 mcd", Manufacturer P/N=SML-P12UTT86R, Mounting Technology=SMD, Number of LEDs=1, Pins=2, RoHS Compliant=Yes
D4 D5 D6 D7 D8 D9 D10 D11 D12 D13 D14 D15 D16 D17 D18 D19: library part D01-0402-01-00000-1, "Led green 0402", Case/Package=0402, Colour=Green, Forward Current="20 mA", Forward Voltage=2.1V, Manufacturer=ROHM, Max Operating Temperature=85°C, Max Power Dissipation=52mW, Min Operating Temperature=-40°C, Dominant Wavelength="560 nm", Lens Style="Rectangular, Square", Luminous Intensity="10 mcd", Manufacturer P/N=SML-P13PTT86R, Mounting Technology=SMD, Number of LEDs=1, Pins=2, RoHS Compliant=Yes
FD1 FD2 FD3: library part CMP-00028-00005-2, "Fiducial - Round 1x2mm", Pins=0
J1 J2 J3: library part J01-001-01-00001-2, "Conn Socket and Terminal Strip HDR/SKT 100 POS 0.5mm Solder ST SMD T/R", Case/Package=SMD, Housing Color=Black, Manufacturer=Samtec, Max Operating Temperature=125°C, Min Operating Temperature=-55°C, Contact Material=Bronze, Contact Plating=Gold, Depth="4.98 mm", Gender=HERMAPHRODITIC, Housing Material=Polymer, Length="29.7 mm", Manufacturer P/N=LSHM-150-06.0-L-DV-A-N-K-TR, Mounting Technology=SMD, Number of Rows=2, Orientation=Straight, Pins=100, Pitch="500 µm", RoHS Compliant=Yes, Termination=Solder
J4: library part J01-001-01-00003-2, "6 Vias Pin Header 2.54mm, Right Angle", Case/Package="Through Hole", Housing Color=Black, Manufacturer=Samtec, Max Operating Temperature=125°C, Min Operating Temperature=-55°C, Contact Material=Bronze, Contact Plating=Gold, Depth="4.87 mm", Gender=Male, Housing Material=Polyester, Length="7.62 mm", Manufacturer P/N=TSW-103-08-F-D-RA, Mounting Technology="Through Hole", Number of Rows=2, Orientation=Straight, Pins=6, Pitch=2.54mm, RoHS Compliant=Yes, Termination=Solder
J5: library part J01-001-01-00005-2, "6 Vias Pin Header 2.54mm, Right Angle, 1 Row", Case/Package="Through Hole", Housing Color=Black, Manufacturer=Samtec, Max Operating Temperature=125°C, Min Operating Temperature=-55°C, Contact Material=Bronze, Contact Plating=Gold, Depth="4.87 mm", Gender=Male, Housing Material=Polyester, Length="7.62 mm", Manufacturer P/N=HTSW-106-08-F-S-RA, Mounting Technology="Through Hole", Number of Rows=2, Orientation=Straight, Pins=6, Pitch=2.54mm, RoHS Compliant=Yes, Termination=Solder
J6: library part J01-001-01-00010-2, "Conn Socket Strip SKT 40 POS 2.54mm Solder ST Top Entry Thru-Hole TIGER CLAW™ Tube", Case/Package="Through Hole", Housing Color=-, Manufacturer=Samtec, Max Operating Temperature=125°C, Min Operating Temperature=-40°C, Contact Material=-, Contact Plating=Gold, Depth=-, Gender=Female, Housing Material=-, Length=-, Manufacturer P/N=BCS-120-F-D-TE, Mounting Technology=SMD, Number of Rows=2, Orientation=-, Pins=40, Pitch=2.54mm, RoHS Compliant=Yes, Termination=Solder
K1 K2 K3 K4 K6 K7 K8 K9 K10 K11 K12 K13 K14 K15: library part K01-0008-01-00002-6, "Reed Relay 5VDC 350Ohm 0.5A SPST-NO THT", Case/Package=SIP, Coil Current=14.28mA, Coil Voltage (DC)=5V, Contact Current Rating=500mA, Contact Resistence=0.2, Insulation Resistance=1T, Manufacturer=COTO, Max Operating Temperature=85°C, Min Operating Temperature=-20°C, Switching Voltage=200V, Coil resitence=350, Coil Type=Non-Latching, Contact Form=SPST, Contact Material=Ruthenium, Height=7.6mm, Manufacturer P/N=9002-05-00, Mounting Technology="Through Hole", Number of Terminal=6, Operate Time=350µs, Packaging=Bulk, Pins=6, Relay Type=RF, Release Time=100µs, Rise time=350µs, RoHS=Yes, Switching Current=500mA, Width=19.3mm
K5 K16: library part K01-0008-01-00008-1, "Reed Relay, Mini SIP, 5 VDC; 1 Form A, 15W, 200 VDC, 1.25A", Case/Package=SIP, Coil Current=10mA, Coil Voltage (DC)=5V, Contact Current Rating=1A, Contact Resistence=0.15, Insulation Resistance=0, Manufacturer=Comus, Max Operating Temperature=85°C, Min Operating Temperature=-40°C, Switching Voltage=200V, Coil resitence=500, Coil Type=-, Contact Form=1A, Contact Material=-, Height=6.98mm, Manufacturer P/N=3570.1419.051, Mounting Technology=TH, Number of Terminal=4, Operate Time=350µs, Packaging=SIP, Pins=4, Relay Type=Reed, Release Time=100µs, Rise time=0s, RoHS=Yes, Switching Current=1A, Width=15.24mm
MH1 MH2 MH3 MH4: library part CMP-00028-00007-1, "hole 5mm pad drill 2.2", Case/Package=Pad, Max Operating Temperature=-40°C, Min Operating Temperature=125°C, Mounting Technology=Pad, Pins=1, RoHS Compliant=yes
MH5 MH6 MH7 MH8: library part CMP-00028-00009-1, "hole 6mm pad drill 2.7", Case/Package=Pad, Max Operating Temperature=-40°C, Min Operating Temperature=125°C, Mounting Technology=Pad, Pins=1, RoHS Compliant=yes
R1: library part R01-0402-01-00169-2, "RES SMD 10K OHM 1% 1/16W 0402", Case/Package=0402, Manufacturer=Yageo, Max Operating Temperature=155°C, Min Operating Temperature=-55°C, Power Rating=62.5mW, Temperature Coefficient="100 ppm/ºC", Tolerance=1%, Voltage Rating=50V, Composition="Thick Film", Features="Automotive AEC-Q200, Moisture Resistant", Height=370µm, Length=990.6µm, Manufacturer P/N=AC0402FR-0710KL, Number of Terminations=2, Packaging="Tape & Reel", RoHS=Yes, Width=508µm
R2 R3 R4 R5 R6 R7 R8 R9 R10 R11 R12 R13 R14 R15 R16 R17 R18 R19 R20: library part R01-0402-01-00437-2, "RES SMD 240 OHM 1% 1/16W 0402", Case/Package=0402, Manufacturer=Yageo, Max Operating Temperature=155°C, Min Operating Temperature=-55°C, Power Rating=62.5mW, Temperature Coefficient="100 ppm/ºC", Tolerance=1%, Voltage Rating=50V, Composition="Thick Film", Features="Automotive AEC-Q200, Moisture Resistant", Height=370µm, Length=990.6µm, Manufacturer P/N=AC0402FR-07240RL, Number of Terminations=2, Packaging="Tape & Reel", RoHS=Yes, Width=508µm
U1 U2 U3 U5 U6 U7: library part CMP-0007-0001-00001-1, "8 x 8 Analog Switch Array with Low On-resistance, for (VDD - VEE) = 4.5 to 13.2V", Case/Package=PLLC, Manufacturer=Microchip, Max Operating Temperature=13.2°C, Max Supply Voltage=85V, Min Operating Temperature=-40°C, Min Supply Voltage=4.5, On-State Resistance=65, Output Current=15mA, Height=4.57mm, Length=11.58mm, Manufacturer P/N=MT8808AP1, Mounting Technology=SMD, Number of Elements=8, Number of Inputs=8, Number of Outputs=8, Pins=28, RoHS Compliant=yes, Width=11.58mm
U4: library part U01-0007-01-00000-1, "AVR ATmega Microcontroller 8-bit 16MHz 256KB FLASH TQFP100", Case/Package=A, Frequency=16MHz, Manufacturer=Microchip, Max Operating Temperature=85°C, Max Supply Voltage=5.5V, Min Operating Temperature=-40°C, Minimum Supply Voltage=4.5V, Contact Plating=Tin, Core Architecture=AVR, Height=1.2mm, Interface="I2C, SPI, UART", Manufacturer P/N=ATMEGA2560-16AU, Max Frequency=16MHz, Memory Size=256KB, Memory Type=FLASH, Mounting Technology=SMD, Number of A/D="1 AD / 16 channels", Number of I/O=86, Number of Programmable I/O=86, Oscillator Type=External, Peripherals="Brown-out Detect/Reset, POR, PWM, WDT", Pins=100, RAM Size=8KB, RoHS=Yes, Watchdog Timer=Yes, Width=16.25mm
U8 U9 U10: library part CMP-0005-0001-00000-1, "SRDA Series 15 V 8 pF SMT RailClamp® Low Capacitance TVS Diode Array - SOIC-8", Breakdown Voltage=3.2V, Capacitance=8pF, Case/Package=so-8, Clamping Voltage=15V, Leakage Current=1µV, Manufacturer=Semtech, Max Breakdown Voltage=6V, Max Operating Temperature=125°C, Max Power Dissipation=500W, Min Operating Temperature=-55°C, Peak Pulse Current=25A, Direction=Unidirectional, Height=1.75mm, Length=5mm, Manufacturer P/N=SRDA3.3-6.TBT, Mounting Technology=SMD, Number of Channels=6, Pins=8, RoHS Compliant=yes, Width=4mm
U11 U12 U13: library part CMP-0005-0001-00001-1, "50-V, 7-ch darlington transistor array, -40 to 105C 16-TSSOP -40 to 105", Case/Package=TSSOP, Manufacturer="Texas Instruments", Max Operating Temperature=-40°C, Min Operating Temperature=105°C, Voltage Rating=50V, Height=1.2mm, Length=5mm, Manufacturer P/N=ULN2003AIPWR, Mounting Technology=SMD, Pins=16, RoHS Compliant=yes, Width=4.4mm
Y1: library part Y01-0001-01-00000-10, "16MHz ±10ppm 16pF 80Ω SMD-2520_4P", Case/Package=SMD-2520_4P, Frequency=16MHz, Load Capacitance=16pF, Max Operating Temperature=85°C, Min Operating Temperature=-40°C, ESR=80, Mounting Technology=SMD, Pins=4, RoHS Compliant=yes

## Via types
v1: diameter 17.72, hole 7.87, L1 to L4, 494 vias

## Nets (pads, with @x,y where several pads share a name; then routed paths per layer and width w, separated by ;. In a path a pad name is that pad's centre, name@x,y a point inside that pad or via, vN(x,y) a via of type N, cw(c..) or ccw(c..) an arc to the next point about the centre after c; other vN are vias at no path point)
+3V3: J6.1 J6.17 K5.4 | length 2867.1
  L3 w10: J6.17@2216.93,3055.2 2216.93,3008.07 2250,2975 3003.86,2975 3016.93,2988.07 ; J6.1@3016.93,3055.2 3016.93,2988.07 ; K5.4@3725,1870 3785,1870 3850,1935 3850,2810 3825,2835 3515,2835 3440,2910 3095,2910 3016.93,2988.07
+5V: C1.2 C2.2 C3.2 C4.2 C5.2 C6.2 C7.2 C8.2 C9.2 C10.2 C11.2 C12.2 C15.2 C16.2 C17.2 J2.1 J2.3 J2.5 J3.2 J3.4 J3.6 J4.2 J5.1 J6.2 J6.4 K1.2 K2.2 K3.2 K4.2 K5.2 K6.2 K7.2 K8.2 K9.2 K10.2 K11.2 K12.2 K13.2 K14.2 K15.2 K16.2 K16.4 R1.2 R4.1 R5.1 R6.1 R7.1 R8.1 R9.1 R10.1 R11.1 R12.1 R13.1 R14.1 R15.1 R16.1 R17.1 R18.1 R19.1 R20.1 U1.19 U2.19 U3.19 U4.10 U4.31 U4.61 U4.80 U4.98 U4.100 U5.19 U6.19 U7.19 U11.9 U12.9 U13.9 | length 2402.9
  L1 w4: R9.1@115,632.4 142.4,632.4 v1(145,635) ; R14.1@115,922.4 152.4,922.4 v1(155,925) ; R5.1@340,308.7 381.1,308.7 v1(382.4,310) ; C4.2@925,1940 C4.2@927.05,1942.05 ; R13.1@1050,648.7 1081.1,648.7 v1(1082.4,650) ; R7.1@1055,908.7 1060.15,903.55 1071.45,903.55 v1(1085,890) ; C5.2@1093.15,2258.15 C5.2@1095,2260 C5.2@1095,2259.21 ; v1@1118.02,2236.19 v1(1119.65,2236.19) ; C1.2@1135,1515 C1.2@1135.79,1515 ; C3.2@1445,2250 C3.2@1447.48,2247.52 ; J2.1@1486.97,310.51 J2.3@1506.65,310.51 J2.5@1526.34,310.51 ; v1(1658.79,1873.79) 1658.79,1851.21 C2.2@1665,1845 C2.2@1663.63,1843.63 ; v1(1950,935) R11.1@1990,935 ; R17.1@2000,725 2025,725 v1(2040,740) ; U5.19@2274.57,2473 U5.19@2278.25,2469.31 ; R4.1@2338.7,3745 2340,3746.3 v1(2340,3785) ; C12.2@2388.7,1813 C12.2@2390.71,1815 C12.2@2390,1814.29 ; v1(2680,279.8) 2680,279.74 2682.34,277.4 R10.1@2720,277.4 ; R6.1@2925,602.4 v1(2925,645) ; R15.1@2925,858.7 v1(2925,905) ; C17.2@3024.57,1030.43 C17.2@3030,1025 ; v1@3045,1849.92 v1(3045,1855) ; C8.2@3062,2468 C8.2@3065,2465 ; C10.2@3064.92,1830 C10.2@3065.71,1830 ; C10.2@3073.42,1828 C10.2@3076.42,1825 ; U13.9@3304.57,2825.08 U13.9@3309.65,2820 ; C15.2@3329.84,1640.16 C15.2@3330,1640 ; C16.2@3340,2820 C16.2@3345,2815 ; v1(3390,875) R18.1@3390,915 ; R12.1@3442.6,2435 3442.6,2467.6 v1(3455,2480) ; R20.1@3461.3,1755 v1(3461.3,1783.7) ; v1(3625.86,910) R8.1@3660,910 ; C11.2@3665,3453.58 C11.2@3666.42,3455 ; v1(3670,1787.4) 3671.3,1786.1 R19.1@3671.3,1755 ; R16.1@3677.6,2435 3677.6,2462.6 v1(3690,2475)
  L1 w10: v1(910,1975) 925,1960 C4.2@925,1940 ; C4.2@927.05,1942.05 U4.10@981.93,1942.05 ; C6.2@1050,2260 1053.78,2256.22 C6.2@1053.78,2255.43 ; U4.100@1053.78,2191.07 C6.2@1053.78,2255.43 ; v1(1064.14,2237.39) 1064.14,2239.48 1059.17,2244.44 1059.17,2250.04 C6.2@1053.78,2255.43 ; U4.98@1093.15,2191.07 C5.2@1093.15,2258.15 ; v1(1095,1440) R1.2@1095,1470 ; C5.2@1095,2259.21 v1@1118.02,2236.19 ; U4.31@1152.2,1574.93 1152.2,1531.42 1135.79,1515 1160,1515 v1(1170,1525) ; v1(1415,2248.79) 1420.16,2243.63 1438.63,2243.63 C3.2@1445,2250 ; U4.80@1447.48,2191.07 C3.2@1447.48,2247.52 ; U6.19@1535,2475 C9.2@1625,2475 v1(1625,2445) ; U4.61@1598.07,1843.63 C2.2@1663.63,1843.63 ; U5.19@2278.25,2469.31 2335.69,2469.31 2345,2460 C7.2@2345,2429.29 v1(2374.14,2429.29) ; U7.19@2289.57,1813 C12.2@2388.7,1813 ; v1(2390,1785) C12.2@2390,1814.29 ; U3.19@2969.57,2468 C8.2@3062,2468 ; U12.9@2970.08,1030.43 C17.2@3024.57,1030.43 ; U1.19@2974.57,1828 C10.2@3073.42,1828 ; v1(3030,995) C17.2@3030,1025 ; v1@3045,1849.92 C10.2@3064.92,1830 ; C8.2@3065,2465 3066.21,2466.21 3066.21,2491.36 v1(3067.43,2492.57) ; U11.9@3290.59,1640.16 C15.2@3329.84,1640.16 ; U13.9@3309.65,2820 C16.2@3340,2820 ; C15.2@3330,1640 v1(3365,1640) ; C16.2@3345,2815 v1(3375,2815) ; U2.19@3564.57,3455 C11.2@3666.42,3455 ; v1(3665,3425) C11.2@3665,3453.58
  L3 w4: v1(1119.65,2236.19) v1@1120,2235.84 ; v1(2374.14,2429.29) v1@2374.29,2429.29
  L4 w4: J3.2@1486.97,310.51 J3.4@1506.65,310.51 J3.6@1526.34,310.51
  other v1: 1495,245 1520,245 1495,265 1520,265 1495,360 1520,360 1495,380 1520,380
A: J2.7 J3.8 K1.1 | length 698.3
  L1 w11.55: K1.1@1140,250 1350,250 1380,280 1380,305 1405,330 1445,330 1455,340 1455,395 1475,415 1525,415 v1(1545,395) 1546.02,393.98 J2.7@1546.02,310.51
  L4 w11.55: v1(1545,395) 1545.89,394.11 1545.89,310.64 J3.8@1546.02,310.51
A1: J1.49 K1.4 U5.14 U6.14 U7.14 U8.7 | length 5809.7
  L1 w4: K1.4@540,250 540,290 585,335 790,335 860,405 860,915 895,950 1740,950 1805,1015 1805,1455 1875,1525 U8.7@1933.78,1525 ; v1(1270,2325) 1270.22,2325.22 1270.22,2410.22 U6.14@1270.43,2410.43 ; v1(1695,2310) 1705,2320 1705,2810 v1(1792.5,2897.5) ; U8.7@1953.46,1525 2025,1596.54 U7.14@2025,1748.43 2025,1855 2000.86,1879.14 2000.86,2295.86 2010,2305 v1(2010,2325) U5.14@2010,2408.43 ; J1.49@1959.41,3566.42 1959.7,3566.71 1959.7,3619.7 v1(1960,3620)
  L1 w11.55: U8.7@1933.78,1525 U8.7@1953.46,1525
  L4 w4: v1(1270,2325) 1295,2325 1355,2385 1535,2385 1610,2310 v1(1695,2310) 1995,2310 v1(2010,2325) ; v1(1792.5,2897.5) 1792.5,2927.5 1862.82,2997.82 1862.82,3054.64 1863.37,3116.14 1863.4,3122.8 1862.93,3148.68 1862.81,3156.01 1862,3209.94 1862,3213.31 1862.81,3232 1862.81,3232.09 1862.81,3272.81 1960,3370 v1(1960,3620)
ALARM: R2.1 U4.14 | length 2597.3
  L1 w4: v1(908.31,1863.31) U4.14@981.93,1863.31 ; R2.1@1557.4,3750 v1(1615,3750)
  L4 w4: v1(908.31,1863.31) 881.69,1863.31 855,1890 855,2761.45 1065,2971.45 1065,3545 1300,3780 1585,3780 v1(1615,3750)
B: J2.9 J3.10 K2.1 | length 987.9
  L1 w11.55: K2.1@910,580 910,440 945,405 1435,405 1465,435 1535,435 1565.71,404.29 J2.9@1565.71,310.51
  L4 w11.55: J3.10@1565.71,310.51 v1(1565.71,369.29)
B1: J1.47 K2.4 U5.13 U6.13 U7.13 U8.6 | length 5682.5
  L1 w4: K2.4@310,580 310,645 335,670 705,670 755,720 755,880 840,965 1680,965 1770,1055 1770,1480 1865,1575 U8.6@1933.78,1575 ; v1(1220,2330) 1220.22,2330.22 1220.22,2410.22 U6.13@1220.43,2410.43 ; v1(1670,2335) 1690,2355 1690,2820 v1(1760.29,2890.29) ; J1.47@1939.72,3566.42 1939.86,3566.56 1939.86,3639.86 v1(1940,3640) ; U8.6@1956.06,1575 1995,1613.94 1995,1655 1975,1675 U7.13@1975,1748.43 1975,2081.31 1950,2106.31 1950,2285 1960,2295 v1(1960,2335) U5.13@1960,2408.43
  L1 w11.55: U8.6@1933.78,1575 U8.6@1956.06,1575
  L4 w4: v1(1220,2330) 1295,2405 1555,2405 1625,2335 v1(1670,2335) v1(1960,2335) ; v1(1760.29,2890.29) 1760.29,2915.29 1854.82,3009.82 1854.82,3054.66 1855.4,3119.49 ; 1855.4,3119.54 1854,3206.63 1854,3216.63 1854.82,3285.77 1854.82,3285.85 1855,3290 1940,3375 v1(1940,3640)
C: J2.11 J3.12 K8.1 | length 1243.9
  L1 w11.55: K8.1@910,865 910,720 980,650 980,510 1010,480 1565,480 1585.34,459.66 v1(1585.34,395) 1585.39,394.95 J2.11@1585.39,310.51
  L4 w11.55: v1(1585.34,395) 1585.34,310.56 J3.12@1585.39,310.51
C1: K8.4 U5.12 U6.12 U7.12 U8.5 | length 4040.2
  L1 w4: K8.4@310,865 310,899.85 389.3,979.14 1609.14,979.14 1730,1100 1730,1495 1860,1625 U8.5@1933.78,1625 1933.78,1661.22 1925,1670 U7.12@1925,1748.43 1925,1820 1930,1825 1930,2075 1920,2085 1810,2085 1790,2105 1790,2145 1805,2160 1865,2160 1890,2185 1890,2310 1910,2330 U5.12@1910,2408.43 1901.57,2400 v1(1860,2400) ; U6.12@1170.43,2410.43 1170.22,2410.22 1170.22,2347.4 1187.62,2330 v1(1195,2330)
  L4 w4: v1(1195,2330) 1278,2413 1772,2413 1785,2400 v1(1860,2400)
COIL0: D4.1 K1.3 U12.14 | length 3486.5
  L1 w4: D4.1@340,187.38 712.38,187.38 740,215 K1.3@740,250 ; v1(2861.61,1158.39) U12.14@2970.08,1158.39
  L4 w4: K1.3@740,250 795,305 925,305 1010,390 1010,995 1035,1020 2535,1020 2545,1010 2630,1010 2645,995 2710,995 2730,1015 2730,1115 2750,1135 2838.23,1135 v1(2861.61,1158.39)
COIL1: D8.1 K2.3 U12.15 | length 3502.7
  L1 w4: D8.1@115,520 115,495 140,470 485,470 510,495 K2.3@510,580 ; v1(2830,1180) 2833.71,1180 2837.69,1183.98 U12.15@2970.08,1183.98
  L4 w4: K2.3@510,580 510,640 595,725 950,725 980,755 980,995 1020,1035 2560,1035 2570,1025 2645,1025 2660,1010 2690,1010 2705,1025 2705,1130 2730,1155 2820,1155 2830,1165 v1(2830,1180)
COIL2: D12.1 K3.3 U12.12 | length 2474.8
  L1 w4: D12.1@1050,535 1130,535 1165,570 1165,640 1185,660 v1(1235,660) ; v1(1300,705) 1555,705 1635,625 1635,615 K3.3@1645,615 ; v1(2875,1105) 2877.2,1107.2 U12.12@2970.08,1107.2
  L4 w4: v1(1235,660) 1280,705 v1(1300,705) ; K3.3@1640,620 1685,665 1685,910 1730,955 2755,955 2775,975 2775,1060 2810,1095 2863.99,1095 2873.99,1105 v1(2875,1105)
COIL3: D16.1 K4.3 U12.10 | length 1398
  L1 w4: D16.1@2000,614.57 2004.57,610 v1(2040,610) ; v1(2890,1040) 2906.02,1056.02 U12.10@2970.08,1056.02
  L4 w4: v1(2040,610) 2060,630 2060,675 2085,700 2410,700 2475,635 K4.3@2585,635 2585,740 2635,790 2790,790 2830,830 2830,1000 2870,1040 v1(2890,1040)
COIL4: D5.1 K6.3 U11.13 | length 2029.3
  L1 w4: D5.1@2925,485 2930,480 v1(2930,455) ; U11.13@3188.23,1640.16 3188.23,1576.77 3275,1490 v1(3345,1490)
  L4 w4: v1(2930,455) 2935,460 3485,460 3520,495 K6.3@3520,530 3520,555 3555,590 3555,1270 3470,1355 3420,1355 3380,1395 3380,1470 3360,1490 v1(3345,1490)
COIL5: D9.1 K7.3 U11.12 | length 2453.6
  L1 w4: D9.1@2720,164.57 2794.57,164.57 2820,190 3250,190 K7.3@3310,250 ; U11.12@3213.82,1640.16 3213.82,1576.18 3275,1515 v1(3320,1515)
  L4 w4: K7.3@3310,250 3310,375 3360,425 3520,425 3565,470 3565,555 3575,565 3575,1285 3475,1385 3435,1385 3405,1415 3405,1490 3380,1515 v1(3320,1515)
COIL6: D13.1 K8.3 U12.16 | length 3193.3
  L1 w4: D13.1@115,810 115,785 135,765 475,765 510,800 K8.3@510,865 ; v1(2795,1175) 2795,1190 2814.57,1209.57 U12.16@2970.08,1209.57
  L4 w4: K8.3@510,865 510,895 565,950 910,950 1015,1055 2570,1055 2585,1040 2655,1040 2685,1070 2685,1145 2715,1175 v1(2795,1175)
COIL7: D6.1 K9.3 U12.13 | length 2195.8
  L1 w4: D6.1@1055,789.57 1124.57,789.57 1160,825 1160,855 1215,910 1470,910 1510,870 K9.3@1645,870 ; v1(2867.8,1132.8) U12.13@2970.08,1132.8
  L4 w4: K9.3@1645,870 1645,915 1705,975 2740,975 2755,990 2755,1095 2775,1115 2850,1115 v1(2867.8,1132.8)
COIL8: D10.1 K10.3 U12.11 | length 1169.3
  L1 w4: D10.1@1990,819.57 1991.97,819.57 2010.14,801.39 2023.61,801.39 v1(2025,800) ; v1(2895,1080) 2896.61,1081.61 U12.11@2970.08,1081.61
  L4 w4: v1(2025,800) 2040,815 2535,815 2581.36,861.36 2581.36,886.36 K10.3@2585,890 2630,935 2770,935 2795,960 2795,1045 2820,1070 2883.99,1070 2893.99,1080 v1(2895,1080)
COIL9: D14.1 K11.3 U11.14 | length 1756.4
  L1 w4: D14.1@2925,747.38 2925,730 2945,710 v1(2965,710) ; U11.14@3162.64,1640.16 3162.64,1567.36 3260,1470 v1(3320,1470)
  L4 w4: v1(2965,710) 3460,710 3512.1,762.1 3512.1,782.1 K11.3@3520,790 3540,810 3540,1250 3465,1325 3410,1325 3355,1380 3355,1450 3335,1470 v1(3320,1470)
COIL10: D17.1 K12.3 U11.11 | length 1048.9
  L1 w4: U11.11@3239.41,1640.16 3239.41,1580.59 3280,1540 v1(3345,1540) ; D17.1@3505.43,915 3530,915 3545,930 3545,980 3570,1005 3570,1405 v1(3585,1420)
  L4 w4: v1(3345,1540) 3400,1540 3425,1515 3425,1470 K12.3@3467.5,1427.5 ; K12.3@3470,1430 3477.38,1422.62 3582.38,1422.62 v1(3585,1420)
COIL11: D7.1 K13.3 U11.10 | length 1267.8
  L1 w4: U11.10@3265,1640.16 3265,1585 3290,1560 v1(3325,1560) ; D7.1@3770.43,910 3775,914.57 v1(3775,955)
  L4 w4: v1(3325,1560) 3365,1560 3385,1580 3640,1580 3680,1540 3680,1450 3710,1420 K13.3@3730,1420 3730,1325 3680,1275 3680,985 3710,955 v1(3775,955)
COIL12: D11.1 K14.3 U13.15 | length 1139.9
  L1 w4: U13.15@3151.02,2825.08 3151.02,2758.98 3185,2725 v1(3360,2725) ; K14.3@3520,2945 3575,2890 3575,2456.97 3555,2436.97 D11.1@3555,2435
  L4 w4: v1(3360,2725) 3380,2725 3410,2755 3410,2855 3493.75,2938.75 3513.75,2938.75 K14.3@3520,2945
COIL13: D15.1 K15.3 U13.16 | length 1479.2
  L1 w4: U13.16@3125.43,2825.08 3125.43,2754.57 3180,2700 v1(3345,2700) ; K15.3@3780,2950 3730,2900 3730,2525 3750,2505 3770,2505 3790,2485 D15.1@3790,2435
  L4 w4: v1(3345,2700) 3395,2700 3435,2740 3435,2835 3490,2890 3720,2890 K15.3@3780,2950